# Allegro board fmc_tlu_cfd_03.brd
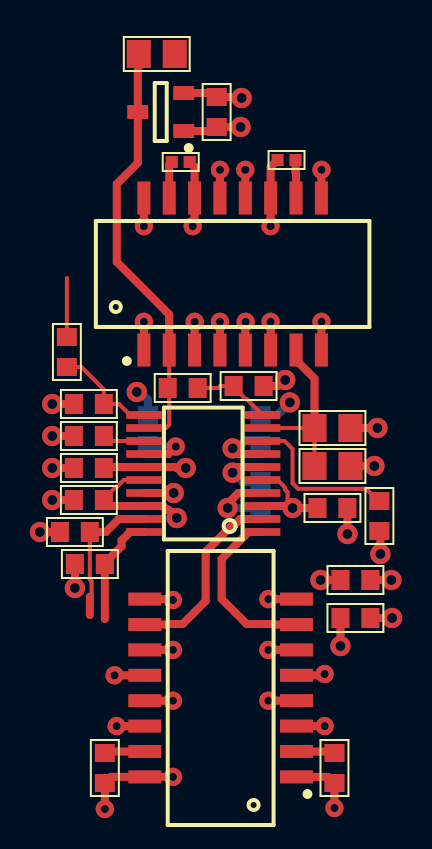
[diagram p0: board, top side]
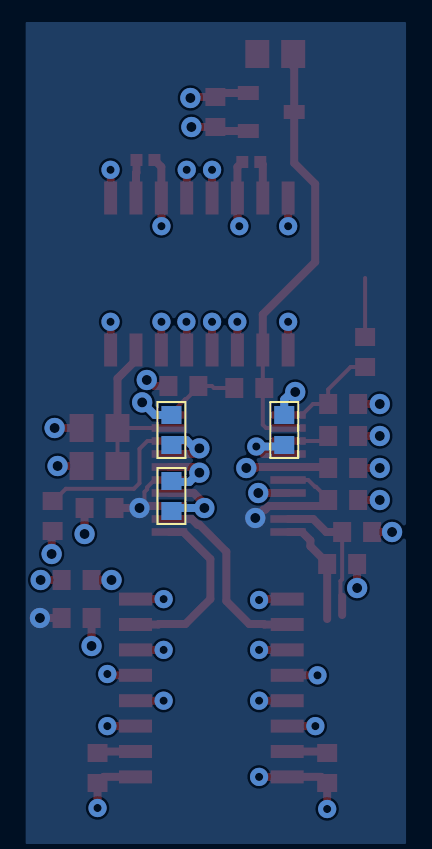
[diagram p1: board, bottom side, seen from below]

No outline. copper layers: TOP, LAYER2, LAYER3, LAYER4, LAYER5, BOTTOM. Coordinates in mm from the lowest, leftmost part position.

## Design rules (mm)
constraint set DEFAULT: pair gap 0.22

## Placement (name value [footprint] x y rotation side)
C1  100nF  [C0603]  7.5 32.8 90 top
C2  10nF  [C0603]  1.1 18.2 0 top
C3  1.0uF  [C0603]  14.45 7.5 0 top
C4  1.0uF  [C0603]  14.45 9.4 0 top
C5  100nF  [C0603]  13.3 13 180 top
C6  1.0uF  [C0603]  1.1 15 0 top
C7  100nF  [C0603]  9.7 16.9 270 bottom
C8  100nF  [C0603]  1.1 13.4 0 top
C9  100nF  [C0603]  9.7 13.6 90 bottom
C10  100nF  [C0603]  4.05 16.9 270 bottom
D1  -  [SOT95P240X130-3N]  4.7 32.8 180 top
IC1  -  [SOIC127P835X237-16N]  8.3 24.7 90 top
IC2  -  [TSSOP20MA_065]  9.8 11.8 90 top
IC3  -  [SOIC127P835X237-16N]  7.7 4 180 top
R1  51  [C0402]  5.7 30.3 180 top
R2  12  [C0805]  4.5 35.7 180 top
R3  51  [C0603]  5.8 19 0 top
R4  51  [C0402]  11 30.4 0 top
R5  100  [C0603]  0 20.8 270 top
R6  100  [C0805]  13.3 17 180 top
R7  100  [C0603]  9.1 19.1 180 top
R8  100  [C0805]  13.3 15.1 180 top
R9  33k  [C0603]  1.1 16.6 0 top
R10  XX  [C0603]  15.65 12.6 90 top
R11  75  [C0603]  0.4 11.8 0 top
R12  75  [C0603]  1.9 0 90 top
R13  75  [C0603]  1.15 10.2 0 top
R14  75  [C0603]  13.4 0 90 top

## Library data of the parts
C1 C5 C7-C10 = CAPCERSMDCL2: part number: CAPCERSMDCL2_0603-100NF,16V; tolerance: 10%
C2 = CAPCERSMDCL2: part number: CAPCERSMDCL2_0603-10NF,50V; tolerance: 10%
C3 C4 C6 = CAPCERSMDCL2: part number: CAPCERSMDCL2_0603-1.0UF,6.3V; tolerance: 10%
D1 = DIODE_DUAL_SERIES: part number: HBAT-540C
IC1 = DELAY_LINE_GL2L: part number: GL2L5LS050D-C
IC2 = MAX9601
IC3 = DELAY_LINE_GL2L: part number: GL2L5LS100D-C
R1 R4 = RSMD0402: part number: RSMD0402_1/16W-51,1%; tolerance: 1%
R2 = RSMD0805: part number: RSMD0805_125MW-12,1%; tolerance: 1%
R3 = RSMD0603: part number: RSMD0603_1/10W-51,1%; tolerance: 1%
R5 R7 = RSMD0603: part number: RSMD0603_1/10W-100,1%; tolerance: 1%
R6 R8 = RSMD0805: part number: RSMD0805_125MW-100,1%; tolerance: 1%
R9 = RSMD0603: part number: RSMD0603_1/10W-33K,1%; tolerance: 1%
R10 = RSMD0603: part number: RSMD0603_1/10W-XX,1%; tolerance: 1%
R11-R14 = RSMD0603: part number: RSMD0603_1/10W-75,1%; tolerance: 1%

## Footprints (pads in the part's own frame, mm; a bottom-side part is the same pattern mirrored in y, then rotated)
C0402
  rect 0.6x0.6 smd: 1(-0.45,0) 2(0.45,0)
C0603
  rect 0.9x1 smd: 1(-0.75,0) 2(0.75,0)
C0805
  rect 1.2x1.4 smd: 1(-0.9,0) 2(0.9,0)
SOIC127P835X237-16N
  rect 1.65x0.65 smd: 1(-3.8,4.445) 2(-3.8,3.175) 3(-3.8,1.905) 4(-3.8,0.635) 5(-3.8,-0.635) 6(-3.8,-1.905) 7(-3.8,-3.175) 8(-3.8,-4.445) 9(3.8,-4.445) 10(3.8,-3.175) 11(3.8,-1.905) 12(3.8,-0.635) 13(3.8,0.635) 14(3.8,1.905) 15(3.8,3.175) 16(3.8,4.445)
SOT95P240X130-3N
  rect 1.05x0.7 smd: 1(-1.15,0.95) 2(-1.15,-0.95) 3(1.15,0)
TSSOP20MA_065
  rect 0.381x1.778 smd: 1(0,0) 2(0.65,0) 3(1.3,0) 4(1.95,0) 5(2.6,0) 6(3.25,0) 7(3.9,0) 8(4.55,0) 9(5.2,0) 10(5.85,0) 11(5.85,5.94) 12(5.2,5.94) 13(4.55,5.94) 14(3.9,5.94) 15(3.25,5.94) 16(2.6,5.94) 17(1.95,5.94) 18(1.3,5.94) 19(0.65,5.94) 20(0,5.94)

## Nets
GND_SIGNAL: C2.1(A<0>) C3.1(A<0>) C4.1(A<0>) C5.1(A<0>) C6.1(A<0>) C7.1(A<0>) C8.1(A<0>) C9.1(A<0>) C10.1(A<0>) IC1.1(SH<0>) IC1.3(SH<1>) IC1.4(SH<2>) IC1.5(SH<3>) IC1.6(SH<4>) IC1.8(SH<5>) IC1.9(SH<6>) IC1.11(SH<7>) IC1.12(SH<8>) IC1.13(SH<9>) IC1.14(SH<10>) IC1.16(SH<11>) IC2.4(LE<0>) IC2.17(LE<0>) IC3.1(SH<0>) IC3.3(SH<1>) IC3.4(SH<2>) IC3.5(SH<3>) IC3.6(SH<4>) IC3.8(SH<5>) IC3.9(SH<6>) IC3.11(SH<7>) IC3.12(SH<8>) IC3.13(SH<9>) IC3.14(SH<10>) IC3.16(SH<11>) R1.1(A<0>) R4.1(A<0>) R6.1(A<0>) R7.1(A<0>) R8.1(A<0>) R9.1(A<0>) R10.1(A<0>) R11.1(A<0>) R12.1(A<0>) R13.1(A<0>) R14.1(A<0>)
P2V5: C3.2(B<0>) C5.2(B<0>) C8.2(B<0>) IC2.3(VCCO_<0>) IC2.5(LE*<0>) IC2.16(LE*<0>) IC2.18(VCCO_<1>)
P5V: C1.2(B<0>) C4.2(B<0>) C7.2(B<0>) C10.2(B<0>) D1.2(C) IC2.7(VCC<0>) IC2.14(VCC<1>)
VIN: R2.1(A<0>)
CFD_OUT: IC3.2(A1) R14.2(B<0>)
CFD_OUT*: IC3.15(A2) R12.2(B<0>)
LEADING_EDGE_OUT: IC2.20(Q<0>) R13.2(B<0>)
LEADING_EDGE_OUT*: IC2.19(Q*<0>) R11.2(B<0>)
M5V: C1.1(A<0>) C6.2(B<0>) C9.2(B<0>) D1.1(A) IC2.6(VEE<0>) IC2.15(VEE<1>)
UNNAMED_1_CAPCERSMDCL2_I78_B: C2.2(B<0>) IC2.11(IN+<0>) R5.2(B<0>)
UNNAMED_1_DELAYLINEGL2L_I140_A1: D1.3(AC) IC1.2(A1) IC2.12(IN-<0>) R2.2(B<0>) R3.1(A<0>)
UNNAMED_1_DELAYLINEGL2L_I140_A2: IC1.15(A2) R1.2(B<0>)
UNNAMED_1_DELAYLINEGL2L_I140_B2: IC1.10(B2) R4.2(B<0>)
UNNAMED_1_MAX9601_I1_HYS: IC2.8(HYS<0>) R10.2(B<0>)
UNNAMED_1_MAX9601_I1_IN: IC2.10(IN+<0>) R3.2(B<0>) R7.2(B<0>)
UNNAMED_1_MAX9601_I1_IN_1: IC1.7(B1) IC2.9(IN-<0>) R6.2(B<0>) R8.2(B<0>)
UNNAMED_1_MAX9601_I1_Q: IC2.2(Q*<0>) IC3.10(B2)
UNNAMED_1_MAX9601_I1_Q_1: IC2.1(Q<0>) IC3.7(B1)
UNNAMED_1_MAX9601_I71_HYS: IC2.13(HYS<0>) R9.2(B<0>)
VTHRESH: R5.1(A<0>)

## Via types
v1: diameter 1.016, hole 0.5, TOP to BOTTOM, 26 vias
v2: diameter 0.914, hole 0.406, TOP to BOTTOM, 26 vias

## Routing (per net, layer and track width the routed paths; a pad name or vN(x,y) marks a point on that pad's centre or on a via; arc(x,y) is an arc through that point)
GND_SIGNAL: length 67
  TOP w0.4: v2(10.2,22.31) 10.2,22.3 10.21,22.29 IC1.6 ; v1(8.05,13) 8.05,13.22 8.58,13.75 IC2.4 ; v2(10.2,27.09) 10.2,28.49 10.21,28.5 10.21,30.05 R4.1 ; R13.1 v1(0.4,9) ; C6.1 v1(-0.74,15) ; IC3.1 13.09,-0.45 R14.1 v2(13.4,-2) ; IC1.16 v2(3.85,27.09) ; v2(5.31,8.4) 5.05,8.4 5,8.44 3.9,8.44 ; IC1.4 v2(7.67,22.31) ; v2(12.75,29.91) 12.75,29.8 12.74,29.8 12.74,28.5 ; R7.1 10.55,19.1 10.85,19.4 v1(10.93,19.4) ; v2(12.75,22.31) 12.75,22.2 12.74,22.2 IC1.8 ; IC3.5 12.59,4.63 12.65,4.7 v2(12.91,4.7) ; 11.5,8.44 v2(10.09,8.44) ; R6.1 v1(15.55,17) ; IC3.3 v2(12.91,2.09) ; C4.1 v1(12.7,9.4) ; v2(1.9,-2.05) R12.1 2.21,-0.45 IC3.16 v2(5.31,-0.45) ; IC2.17 v1(5.35,13.75) ; v2(6.4,22.31) 6.4,22.2 6.39,22.2 6.39,20.9 ; 7.67,28.5 v2(7.67,29.91) ; IC3.12 v2(2.38,4.63) ; v1(15.7,10.7) 15.7,11.61 15.65,11.66 R10.1 ; 3.9,3.36 v2(5.31,3.36) ; 11.5,3.36 v2(10.09,3.36) ; IC3.14 v2(2.49,2.09) ; R11.1 v1(-1.35,11.8) ; IC3.11 v2(5.31,5.9) ; IC1.12 v2(8.93,29.91) ; R9.1 v1(-0.74,16.6) ; v2(8.95,22.31) 8.95,22.2 8.93,22.18 8.93,20.9 ; IC3.6 v2(10.09,5.9) ; R8.1 v1(15.4,15.1) ; C2.1 v1(-0.74,18.2) ; R1.1 6.39,30.05 IC1.14 6.39,27.2 6.3,27.1 v2(6.3,27.09) ; 3.85,20.9 v2(3.85,22.31) ; C8.1 v1(-0.74,13.4) ; C3.1 v1(13.7,6.1) ; C5.1 v1(14.05,11.7)
  BOTTOM w0.4: v1(8.05,13) 9.55,13 C9.1 ; C7.1 10.54,17.65 v1(11.17,18.28) ; v1(3.5,18.8) 3.68,18.8 4.05,18.43 C10.1
P2V5: length 12.8
  TOP w0.2: IC2.16 2.85,14.4 2.51,14.06 2.46,14.06 1.85,13.45 ; IC2.5 10.55,14.4 10.92,14.03 10.92,13.93 11.05,13.8 11.05,13.25 v1(11.3,13)
  TOP w0.4: C3.2 v1(16.29,7.5) ; v1(5.5,12.5) 5.08,12.91 5,12.91 4.82,13.1 IC2.18 2.15,13.1 C8.2 1.85,13.45 ; IC2.3 10.92,13.1 11.02,13 v1(11.3,13) C5.2
P5V: length 10.5
  TOP w0.4: v1(8.3,15.98) 8.58,15.7 IC2.7 ; IC2.14 5.08,15.7 v2(5.45,16.07) ; v1(8.75,33.5) 8.7,33.55 C1.2 7.3,33.75 D1.2 ; C4.2 v1(16.25,9.4)
  BOTTOM w0.4: v1(8.3,15.98) 8.53,15.98 8.95,16.4 9.45,16.4 C7.2 ; C10.2 4.13,16.07 v2(5.45,16.07)
CFD_OUT: length 1.9
  TOP w0.4: IC3.2 13.32,0.82 R14.2
CFD_OUT*: length 2
  TOP w0.4: R12.2 1.97,0.82 IC3.15
LEADING_EDGE_OUT: length 5.6
  TOP w0.4: IC2.20 3.16,11.8 2.74,11.38 2.74,11.09 1.9,10.25 R13.2 1.9,7.45
LEADING_EDGE_OUT*: length 7.2
  TOP w0.2: R11.2 1.15,9.43 1.23,9.35 1.23,8.65 1.15,8.57
  TOP w0.4: IC2.19 2.6,12.45 1.95,11.8 R11.2 ; 1.15,8.57 1.15,7.65
M5V: length 10.3
  TOP w0.4: C6.2 1.9,15.05 IC2.15 5.45,15.05 5.5,15 v1(5.95,15) ; v1(8.7,32.05) C1.1 7.42,32.05 7.3,31.93 7.02,31.85 D1.1 ; IC2.6 8.58,15.05 v1(8.3,14.77)
  BOTTOM w0.4: C9.2 9.65,14.3 8.8,14.3 8.33,14.77 v1(8.3,14.77)
UNNAMED_1_CAPCERSMDCL2_I78_B: length 5.3
  TOP w0.2: IC2.11 3.16,17.65 2.61,18.2 C2.2 1.85,18.93 0.73,20.05 R5.2
UNNAMED_1_DELAYLINEGL2L_I140_A1: length 21.5
  TOP w0.2: 5.12,19.07 R3.1 ; 5.12,19.07 IC1.2 ; 5.12,19.07 5.12,17.16 4.96,17 IC2.12
  TOP w0.4: R2.2 3.6,35.07 3.55,35.02 D1.3 3.55,30.25 2.5,29.2 2.5,25.3 5.12,22.67 IC1.2
UNNAMED_1_DELAYLINEGL2L_I140_A2: length 1.9
  TOP w0.4: R1.2 5.12,30.17 5.12,28.5
UNNAMED_1_DELAYLINEGL2L_I140_B2: length 1.9
  TOP w0.4: R4.2 11.45,29.77 11.47,29.75 IC1.10
UNNAMED_1_MAX9601_I1_HYS: length 8.1
  TOP w0.2: IC2.8 10.9,16.35 11.3,15.95 11.3,14.24 11.58,13.96 14.99,13.96 15.6,13.35 R10.2
UNNAMED_1_MAX9601_I1_IN: length 3.9
  TOP w0.2: R3.2 7.57,19 7.67,19.1 R7.2 8.35,19.05 8.96,18.44 9.01,18.44 IC2.10
UNNAMED_1_MAX9601_I1_IN_1: length 8.8
  TOP w0.2: IC2.9 12.3,17 12.4,17.1 R6.2 R8.2
  TOP w0.4: 11.47,20.9 11.47,20.4 12.4,19.47 12.4,17.1
UNNAMED_1_MAX9601_I1_Q: length 9.5
  TOP w0.4: IC2.2 8.68,12.45 8.4,12.16 8.3,12.16 6.95,10.82 6.95,8.35 5.8,7.2 5.08,7.2 5.05,7.17 IC3.10
UNNAMED_1_MAX9601_I1_Q_1: length 8.9
  TOP w0.4: IC3.7 10.35,7.17 10.32,7.2 9,7.2 7.75,8.45 7.75,10.45 9.1,11.8 IC2.1
UNNAMED_1_MAX9601_I71_HYS: length 2.1
  TOP w0.2: IC2.13 2.1,16.35 R9.2
VTHRESH: length 3
  TOP w0.2: R5.1 0,24.5

## Copper pours and planes (outline as drawn; the poured copper is in the pictures)
GND_SIGNAL on LAYER2, LAYER5: -2.05,37.3 -2.05,-3.8 17,-3.8 17,37.3
P2V5 on BOTTOM: -2.05,-3.8 17,-3.8 17,37.3 -2.05,37.3
P5V on LAYER3: -2.05,37.3 -2.05,-3.8 17,-3.8 17,37.3
M5V on LAYER4: -2.05,37.3 -2.05,-3.8 17,-3.8 17,37.3
